# Altium PCB tekprobe.PcbDoc (part 1 of 2)
Units mm, origin at the board's own origin, x right, y up, seen from the top; angles counter-clockwise.
Board outline 60 x 55 mm, 2 copper layers (Top Layer, Bottom Layer), stack 1.572 mm thick; 47 components, 34 nets, 159 pads, 92 vias.
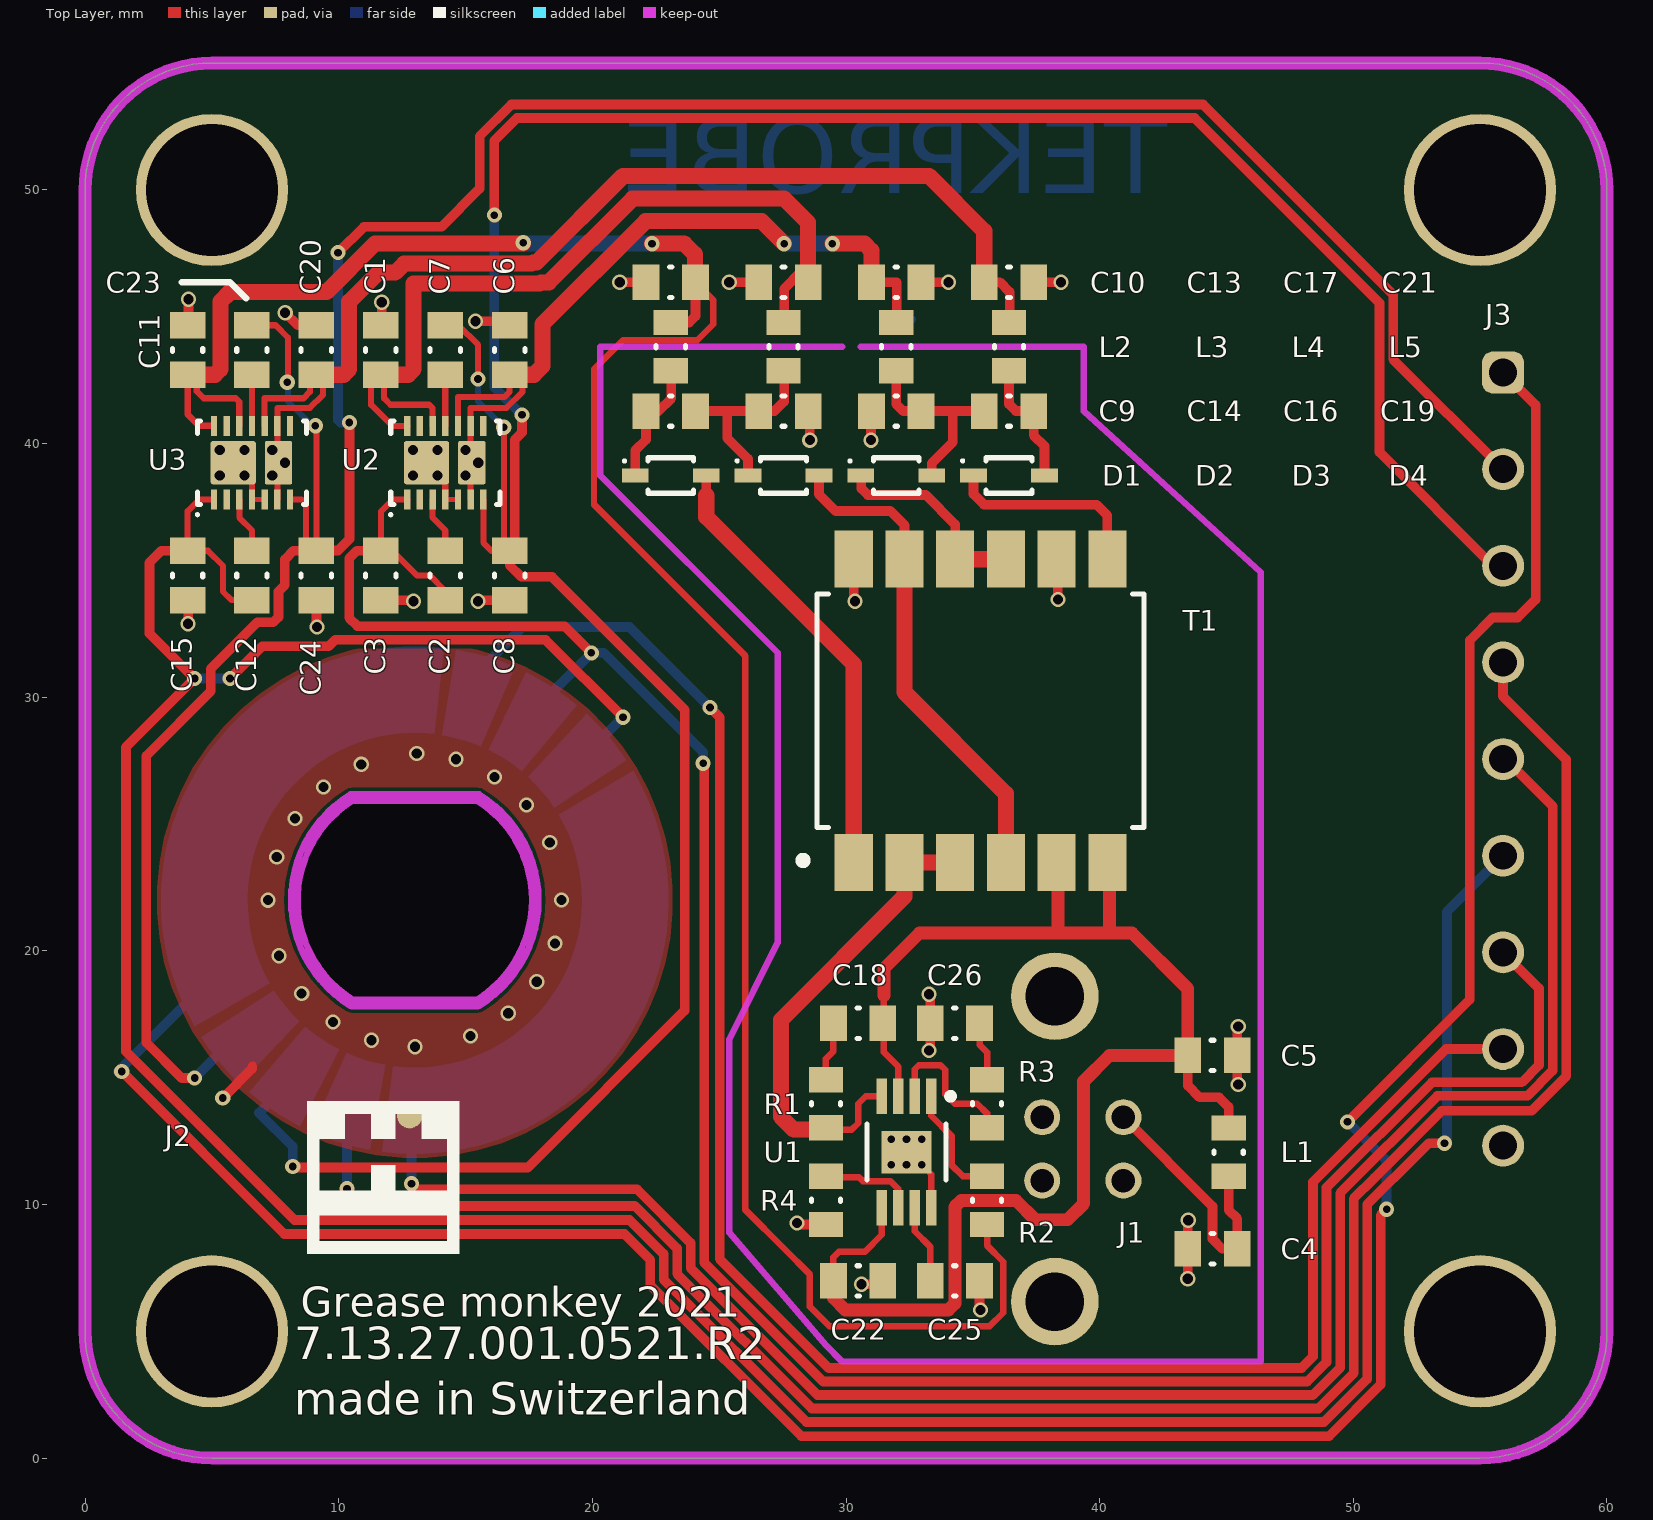
[diagram p0: Top Layer view]
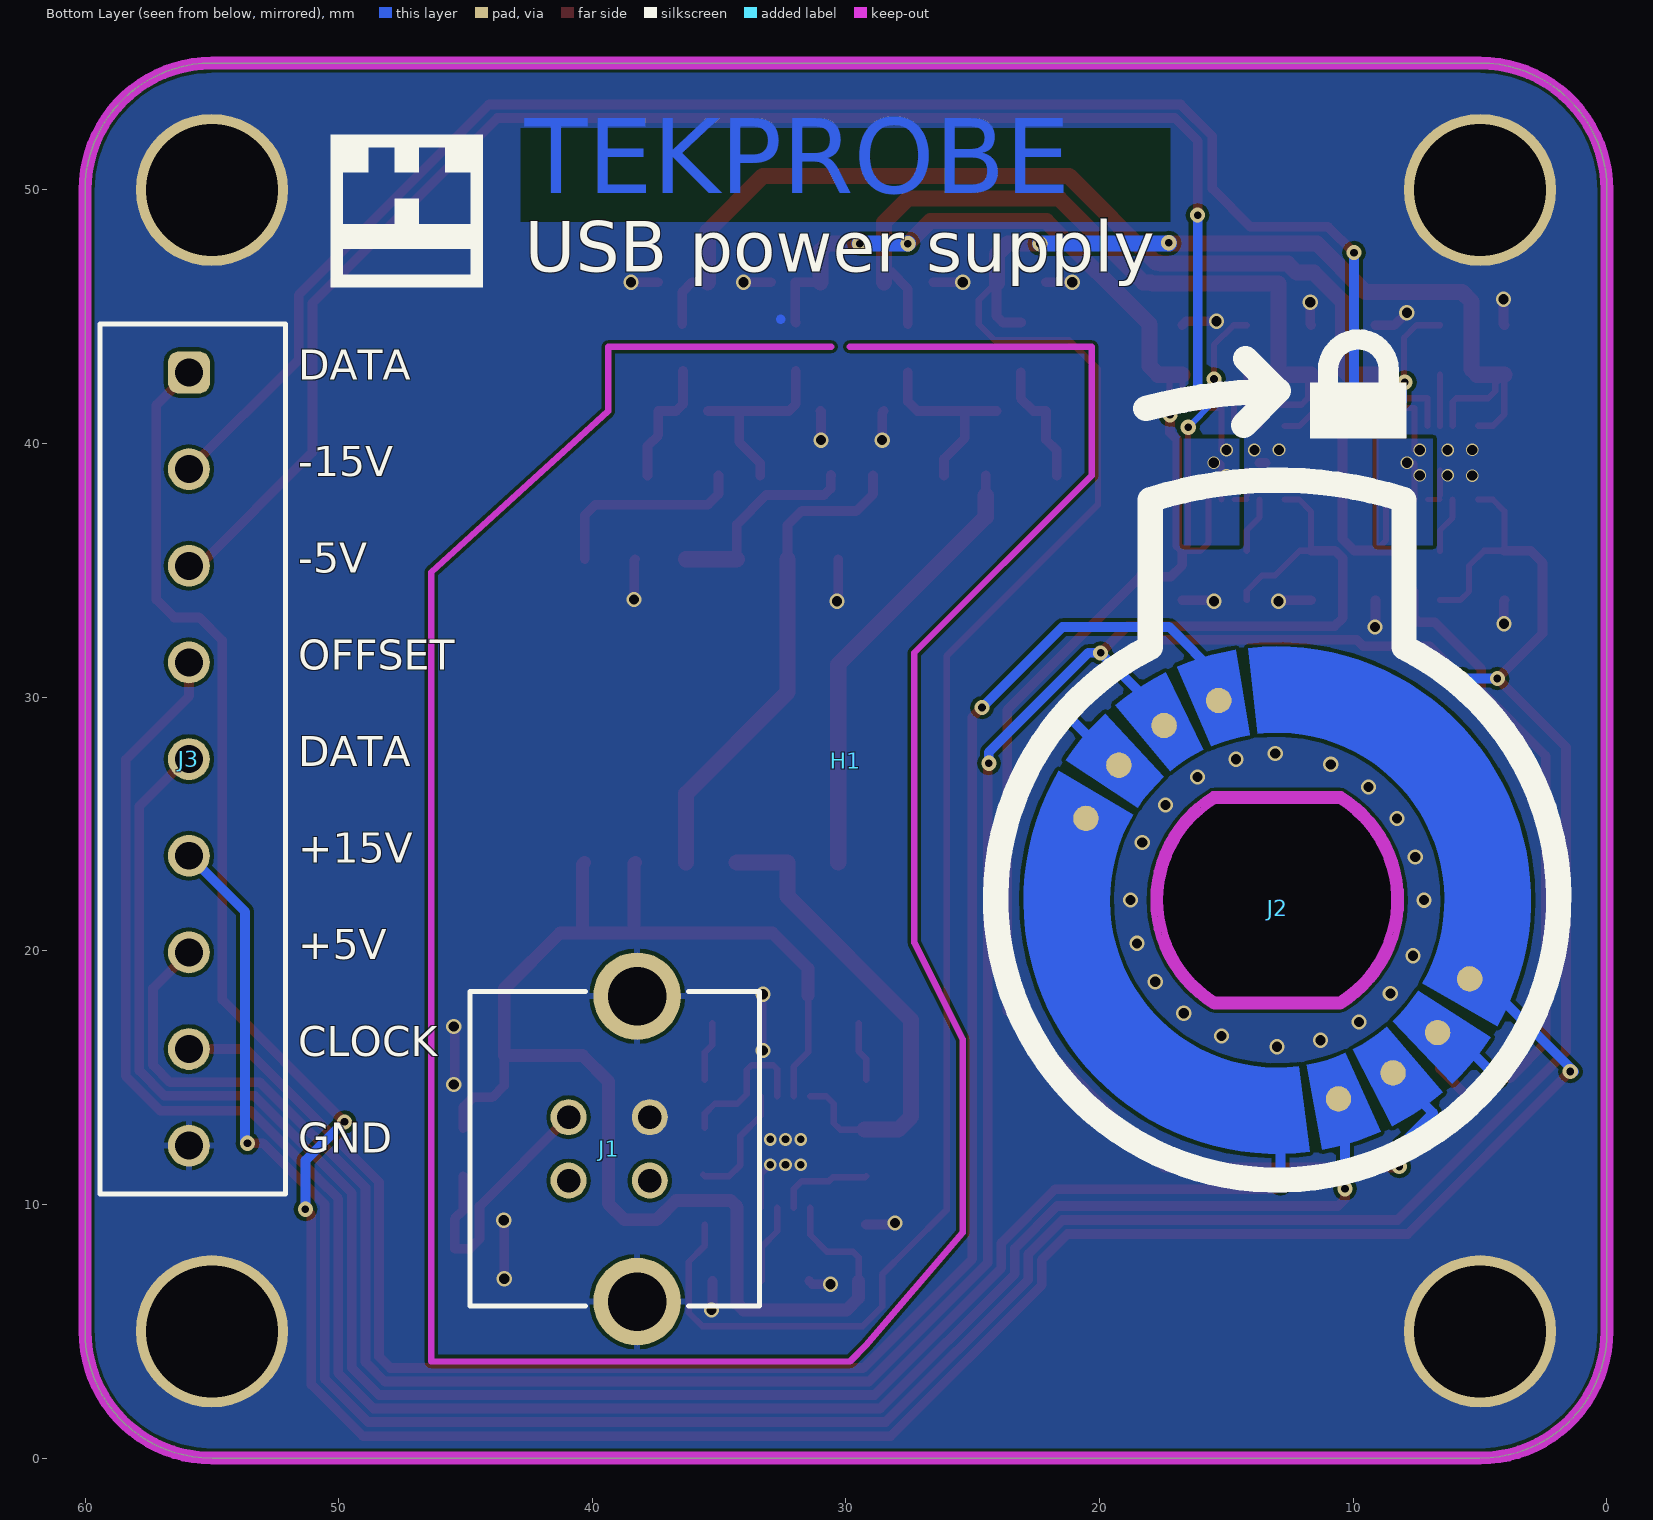
[diagram p1: Bottom Layer view, seen from below]

## Layer stack, top to bottom
Top Solder: solder mask 0.01, Solder Resist, Dk 3.5
Top Layer: signal copper 0.036
Dielectric 1: dielectric 1.5, FR-4, Dk 4.8
Bottom Layer: signal copper 0.036
Bottom Solder: solder mask 0.01, Solder Resist, Dk 3.5

## Board outline
0,4.999 ccw(c4.999,4.999) 4.999,0 55.001,0 ccw(c55.001,4.999) 60,5.003 60,4.999 60,50.001 ccw(c55.001,50.001) 55.001,55 4.999,55 ccw(c4.999,50.001) 0,50.001

## Design rules (kind name [scope] priority, off if disabled: settings)
Clearance Clearance_1 [inPolygon vs (OnLayer('Keep-Out Layer'))] p1: gap=0.127 ignorepadtopadclearanceinfootprint=FALSE except(0: Arc-Hole Track-Hole SMDPad-Hole THPad-Hole Via-Hole Fill-Hole Poly-Hole Region-Hole Text-Hole)
Clearance [All] p2: gap=0.152 ignorepadtopadclearanceinfootprint=FALSE except(0: Arc-Hole Track-Hole SMDPad-Hole THPad-Hole Via-Hole Fill-Hole Poly-Hole Region-Hole Text-Hole)
ComponentClearance [(Name <> 'A1') And (Name <> 'Q1') vs (Name <> 'A1') And (Name <> 'Q1')] p1: gap=0.127 collisioncheckmode=3 verticalgap=0.254 showdistances=FALSE
DiffPairsRouting [All] p1: maxlimit=0.254 minlimit=0.152 mostfreqgap=0.254 toplayer_minwidth=0.152 toplayer_maxwidth=0.381 toplayer_prefwidth=0.381 bottomlayer_minwidth=0.152 bottomlayer_maxwidth=0.381 bottomlayer_prefwidth=0.381 maxuncoupledlength=12.7
Height [All] p1: minheight=0 maxheight=127 prefheight=12.7
HoleSize [All] p1: absolutevalues=TRUE maxlimit=25.4 minlimit=0.3 maxpercent=80.000 minpercent=20.000
MinimumSolderMaskSliver [All] p1: minsoldermaskwidth=0.114
PlaneClearance [All] p1: clearance=0.762
PolygonConnect PolygonConnect_via [IsVia] p1: connectstyle=Direct reliefconductorwidth=0.254 reliefentries=4 polygonreliefangle="90 Angle" airgapwidth=0.254
PolygonConnect [All] p2: connectstyle=Direct reliefconductorwidth=0.254 reliefentries=4 polygonreliefangle="90 Angle" airgapwidth=0.152
RoutingVias [All] p1: holewidth=0.3 width=0.6 viastyle="Through Hole" minholewidth=0.3 minwidth=0.5 maxholewidth=5 maxwidth=10
ShortCircuit ShortCircuit_no_net [Not InAnyNet vs Not InAnyNet] p1: allowed=TRUE
ShortCircuit [not InNet('No Net') vs not InNet('No Net')] p2: allowed=FALSE
SilkToSilkClearance [All] p1 off: silktosilkclearance=0.127
SilkToSolderMaskClearance [IsPad] p1: minsilkscreentomaskgap=0.127 clearancetoexposedcopper=TRUE
SolderMaskExpansion [All] p1: expansion=0.102 istentingtop=FALSE
Width [All] p1: maxlimit=25.4 minlimit=0.152 preferedwidth=0.254 minimp=50.000000 maximp=50.000000 favimp=50.000000
21 further rules are at their usual default settings.

## Classes and differential pairs
component class "tekprobe P2": C1 C2 C3 C6 C7 C8 C10 C11 C12 C13 C15 C17 C20 C21 C23 C24 J2 J3 U2 U3
component class tekprobe: C4 C5 C9 C14 C16 C18 C19 C22 C25 C26 D1 D2 D3 D4 H1 J1 L1 L2 L3 L4 L5 R1 R2 R3 R4 T1 U1

## Components (designator, comment, footprint, x,y, rotation, side; value= is the part's Value field where it differs from the comment)
C1 "10uF" CAP_0805 11.662,43.688 r90 top
C2 "3300pF" CAP_0805 14.202,34.798 r270 top
C3 "10uF" CAP_0805 11.662,34.798 r270 top
C4 "1uF" CAP_0805 44.45,8.255 r180 top
C5 "10uF" CAP_0805 44.45,15.875 r0 top
C6 "10uF" CAP_0805 16.742,43.688 r90 top
C7 "3300pF" CAP_0805 14.202,43.688 r270 top
C8 "10uF" CAP_0805 16.742,34.798 r270 top
C9 "10uF" CAP_0805 23.089,41.28 r0 top
C10 "0.1uF" CAP_0805 23.089,46.36 r180 top
C11 "10uF" CAP_0805 4.042,43.688 r90 top
C12 "3300pF" CAP_0805 6.582,34.798 r270 top
C13 "0.1uF" CAP_0805 27.534,46.36 r180 top
C14 "10uF" CAP_0805 27.534,41.28 r0 top
C15 "10uF" CAP_0805 4.042,34.798 r270 top
C16 "10uF" CAP_0805 31.979,41.28 r0 top
C17 "0.1uF" CAP_0805 31.979,46.36 r0 top
C18 "470pF" CAP_0805 30.48,17.145 r180 top
C19 "10uF" CAP_0805 36.424,41.28 r0 top
C20 "10uF" CAP_0805 9.122,43.688 r90 top
C21 "0.1uF" CAP_0805 36.424,46.36 r0 top
C22 "10uF" CAP_0805 30.48,6.985 r0 top
C23 "3300pF" CAP_0805 6.582,43.688 r270 top
C24 "10uF" CAP_0805 9.122,34.798 r270 top
C25 "0.1uF" CAP_0805 34.29,6.985 r0 top
C26 "1nF" CAP_0805 34.29,17.145 r180 top
D1 "1N4148WSTR" SODFL250X100-2N 23.089,38.74 r0 top
D2 "1N4148WSTR" SODFL250X100-2N 27.534,38.74 r0 top
D3 "1N4148WSTR" SODFL250X100-2N 31.979,38.74 r0 top
D4 "1N4148WSTR" SODFL250X100-2N 36.424,38.74 r0 top
H1 "Aluminum Enclosure" 1550Q 60,0 r180 bottom locked
J1 "USB 2.0 Type B Receptacle" 61400413321 39.116,12.192 r90 bottom
J2 "TEKPROBE interface" tekprobe 13,22 r180 bottom
J3 "691243310009" 691243310009 55.753,27.559 r270 bottom
L1 "MFBW1V2012-801-R" RES_0805 45.085,12.065 r90 top
L2 "MFBW1V2012-801-R" RES_0805 23.089,43.82 r90 top
L3 "MFBW1V2012-801-R" RES_0805 27.534,43.82 r90 top
L4 "MFBW1V2012-801-R" RES_0805 31.979,43.82 r90 top
L5 "MFBW1V2012-801-R" RES_0805 36.424,43.82 r90 top
R1 "22" RES_0805 29.21,13.97 r270 top
R2 "180k" RES_0805 35.56,10.16 r90 top
R3 "10k" RES_0805 35.56,13.97 r90 top
R4 "90k9" RES_0805 29.21,10.16 r270 top
T1 "749196141" WE-FLEX_ER11/5 35.306,29.464 r0 top
U1 "LT3580EMS8E" LT3580 32.385,12.065 r270 top
U2 "LT3032EDE-5#PBF" LT3032 14.202,39.243 r90 top
U3 "LT3032IDE-15#PBF" LT3032 6.582,39.243 r90 top

## Footprints (in the part's own frame and the unit in brackets; to place one, negate y for a bottom-side part, rotate by r counter-clockwise, add the part's x,y. Pads: shape width x height; smd on the part's side, far side on the other; paste and mask are expansions set on the pad)
1550Q [mm]
  round 6 hole 5.2: 1(5,50) 2(55,50) 3(55,5) 4(5,5)
  body extent 0,0 60,55, height 0.6
61400413321 [mm] "USB 2.0 Type B Vertical"
  round 1.42 hole 0.92: 1(1.25,1.82) 2(-1.25,1.82) 3(-1.25,-1.38) 4(1.25,-1.38)
  round 3.45 hole 2.3: Shell(-6.02,-0.88) Shell(6.02,-0.88)
  silkscreen extent -6.2,-5.7 6.2,5.7, body extent -7.35,-5.6 7.35,5.6, height 16.2
691243310009 [mm] "Serie 2433 - 3.81 mm _ 9 pins"
  rrect50% 1.65x1.65 hole 1.1: 1(-15.24,-0.15)
  round 1.65 hole 1.1: 2(-11.43,-0.15) 3(-7.62,-0.15) 4(-3.81,-0.15) 5(0,-0.15) 6(3.81,-0.15) 7(7.62,-0.15) 8(11.43,-0.15) 9(15.24,-0.15)
  silkscreen extent -17.14,-3.65 17.14,3.65, body extent -17.14,-3.65 17.15,3.65, height 9.15
CAP_0805 [mm]
  rect 1.05x1.4 smd: 1(-0.975,0) 2(0.975,0)
  silkscreen extent -0.05,-0.6 0.05,0.6, body extent -1.1,-0.67 1.1,0.67, height 1.35
LT3032 [mm] "SON, 14-Leads, Body 4.00x3.00mm, Pitch 0.50mm, Thermal Pad 2.34x1.62mm, IPC Medium Density"
  rect 0.8x0.25 smd mask+0.03: 1(-1.45,1.5) 2(-1.45,1) 3(-1.45,0.5) 4(-1.45,0) 5(-1.45,-0.5) 6(-1.45,-1) 7(-1.45,-1.5) 8(1.45,-1.5) 9(1.45,-1) 10(1.45,-0.5) 11(1.45,0) 12(1.45,0.5) 13(1.45,1) 14(1.45,1.5)
  rrect10% 1.7x1.78 smd mask+0.03: 15(0,0.74)
  rrect10% 1.7x1.07 smd mask+0.03: 16(0,-1.045)
  Top Layer lines w0.24: -1.3,0 -0.3,0 ; 0.5,-1 1.5,-1
  silkscreen extent -2.1,-2.15 1.65,2.2, body extent -1.55,-2 1.55,2, height 0.75
LT3580 [mm] "TSOP, 8-Leads, Body 3.00x3.00mm, Pitch 0.65mm, Thermal Pad 1.88x1.68mm, IPC Medium Density"
  rect 1.4x0.42 smd mask+0.05: 1(-2.2,0.975) 2(-2.2,0.325) 3(-2.2,-0.325) 4(-2.2,-0.975) 5(2.2,-0.975) 6(2.2,-0.325) 7(2.2,0.325) 8(2.2,0.975)
  rect 1.68x1.98 smd mask+0.05: 9(0,0)
  silkscreen extent -2.32,-1.55 1.1,1.86, body extent -2.45,-1.55 2.45,1.55, height 1.1
RES_0805 [mm] "Chip Resistor, 2-Leads, Body 2.10x1.30mm, IPC Medium Density"
  rect 1x1.35 smd: 1(-0.95,0) 2(0.95,0)
  silkscreen extent -0.05,-0.58 0.05,0.58, body extent -1.1,-0.67 1.1,0.67, height 0.65
SODFL250X100-2N [mm] "SODFL, 2-Leads, Body 1.25x2.50mm, IPC Medium Density"
  rect 1.05x0.55 smd: A(1.4,0) K(-1.4,0)
  silkscreen extent -1.87,-0.7 0.9,0.7, body extent -1.25,-0.67 1.25,0.67, height 1
tekprobe [mm]
  round 1 smd: 1(7.589,-3.107) 2(6.323,-5.221) 3(4.567,-6.81) 4(2.416,-7.836) 5(-7.54,3.222) 6(-6.242,5.318) 7(-4.457,6.883) 8(-2.306,7.869)
  round 1 smd far side mask+0.102: 9(0.2,-8.5)
  Top Layer region: 6.902,-7.237 4.555,-4.776 5.089,-4.202 5.552,-3.569 5.552,-3.569 5.552,-3.569 8.412,-5.408 7.711,-6.367 6.902,-7.237
  Top Layer region: 8.671,-4.981 9.968,-0.798 9.354,3.537 6.946,7.194 3.206,9.472 -1.148,9.934 -1.148,9.934 -0.758,6.556 -0.758,6.556 2.116,6.252 4.584,4.748 6.173,2.335 6.579,-0.527 5.723,-3.287 5.723,-3.287
  Top Layer region: 4.527,-8.917 2.988,-5.885 3.676,-5.482 4.311,-4.998 4.311,-4.998 6.531,-7.573 6.531,-7.573 5.57,-8.305 4.527,-8.917
  Top Layer region: 1.774,-9.841 1.171,-6.495 1.171,-6.495 1.945,-6.307 2.69,-6.027 2.69,-6.027 4.075,-9.132 2.946,-9.556 1.774,-9.841
  Top Layer region: 1.28,-9.918 -3.131,-9.497 -6.927,-7.212 -9.363,-3.511 -9.961,0.879 -8.604,5.097 -8.604,5.097 -5.679,3.364 -6.574,0.58 -6.18,-2.318 -4.572,-4.76 -2.066,-6.268 0.845,-6.546 0.845,-6.546
  Top Layer region: -8.338,5.52 -5.503,3.643 -5.024,4.28 -4.471,4.855 -4.471,4.855 -6.774,7.356 -7.612,6.486 -8.338,5.52
  Top Layer region: -4.222,5.082 -6.388,7.685 -5.432,8.388 -4.399,8.973 -4.399,8.973 -2.91,5.931 -3.591,5.546 -4.222,5.082
  Top Layer region: -2.608,6.063 -3.947,9.188 -3.948,9.188 -3.948,9.188 -3.948,9.188 -3.948,9.191 -3.947,9.195 -3.944,9.197 -3.944,9.197 -3.944,9.197 -2.815,9.603 -1.645,9.871 -1.645,9.871 -1.641,9.87 -1.638,9.868 -1.637,9.865 -1.637,9.865 -1.078,6.511 -1.078,6.511 -1.078,6.51 -1.078,6.51 -1.079,6.507 -1.081,6.505 -1.084,6.504 -1.084,6.504 -1.084,6.504 -1.854,6.327 -2.599,6.06 -2.599,6.06 -2.599,6.06 -2.601,6.059 -2.604,6.06 -2.606,6.061 -2.607,6.063
  Keep-Out Layer board cut-out: -2.482,-4.05 2.482,-4.05 4.144,-2.321 4.75,0 4.144,2.321 2.482,4.05 2.482,4.05 -2.482,4.05 -4.144,2.321 -4.75,0 -4.144,-2.321 -2.482,-4.05
  silkscreen extent -11.1,-11.04 11.1,22.1, body extent -6.5,-6.5 6.5,6.5, height 12.6
WE-FLEX_ER11/5 [mm] "Flexible Transformer for DC/DC Converter, size ER11/5"
  rect 1.5x2.25 smd: 1(-5,-5.975) 2(-3,-5.975) 3(-1,-5.975) 4(1,-5.975) 5(3,-5.975) 6(5,-5.975) 7(5,5.975) 8(3,5.975) 9(1,5.975) 10(-1,5.975) 11(-3,5.975) 12(-5,5.975)
  silkscreen extent -7.15,-6.05 6.45,4.6, body extent -6.45,-6.5 6.45,6.5, height 6.2

## Part data
C1 C3 C5 C6 C8 C9 C11 C14 C15 C16 C19 C20 C22 C24: library part CL21A106KAYNNNG, "CAP CER 10UF 25V X5R 0805", Case Code (Imperial)=0805, Case Code (Metric)=2012, Dielectric=X5R, Manufacturer=Samsung, Max Operating Temperature=85°C, Min Operating Temperature=-55°C, Package Quantity=3000, Supplier Part Number 1=1276-6454-1-ND, Tolerance=10%, Voltage Rating=25V, Capacitance=10uF, Case/Package=0805, Category="Ceramic Capacitors", ComponentLink1Description=https://datasheet.ciiva.com/26920/getdatasheetpartid-660292-26920195.pdf?src-supplier=Verical, ComponentLink1URL=https://datasheet.ciiva.com/26920/getdatasheetpartid-660292-26920195.pdf?src-supplier=Verical, Construction=Flat, Depth=1.25mm, Height=1.25mm, Lead Free="Lead Free", Length=2mm, Manufacturer Part Number=CL21A106KAYNNNG, Mount="Surface Mount", Packaging="Tape and Reel", Pricing 1="1=0.21000, 10=0.14600, 50=0.08280, 100=0.06870, 500=0.04816, 1000=0.03987 (USD)", Radiation Hardening=No, RoHS=Yes, RoHS Compliant=Yes, Series=CL, Stock 1=221798, Supplier 1=Digi-Key, Thickness=0.057inch, Width=0.049inch
C2 C7 C12 C23: library part C0805C332K5RACTU, "KEMET - C0805C332K5RACTU - SMD Multilayer Ceramic Capacitor, 3300 pF, 50 V, 0805 [2012 Metric], ± 10%, X7R, C Series KEMET", Capacitance=3.3nF, Case Code (Imperial)=0805, Case Code (Metric)=2012, Dielectric=X7R, Dielectric Material=Ceramic, Manufacturer=KEMET, Max Operating Temperature=125°C, Min Operating Temperature=-55°C, Package Quantity=1, Supplier Part Number 1=399-1153-1-ND, Tolerance=10%, Voltage=50V, Case/Package=0805, Category="Ceramic Capacitors", ComponentLink1Description=https://datasheet.ciiva.com/7842/kem-c1002-x7r-smd-7842598.pdf?src-supplier=Element14, ComponentLink1URL=https://datasheet.ciiva.com/7842/kem-c1002-x7r-smd-7842598.pdf?src-supplier=Element14, ComponentLink2Description=https://datasheet.ciiva.com/26948/getdatasheetpartid-385720-26948486.pdf?src-supplier=Verical, ComponentLink2URL=https://datasheet.ciiva.com/26948/getdatasheetpartid-385720-26948486.pdf?src-supplier=Verical, ComponentLink3Description=https://datasheet.ciiva.com/5415/kem-c1002-x7r-smd-357932-5415032.pdf?src-supplier=Mouser, ComponentLink3URL=https://datasheet.ciiva.com/5415/kem-c1002-x7r-smd-357932-5415032.pdf?src-supplier=Mouser, ComponentLink4Description=https://datasheet.ciiva.com/6126/kem-c1002-x7r-smd-6126698.pdf?src-supplier=Farnell, ComponentLink4URL=https://datasheet.ciiva.com/6126/kem-c1002-x7r-smd-6126698.pdf?src-supplier=Farnell, ComponentLink5Description=https://datasheet.ciiva.com/7842/1851736-7842314.pdf?src-supplier=Element14, ComponentLink5URL=https://datasheet.ciiva.com/7842/1851736-7842314.pdf?src-supplier=Element14, ComponentLink6Description=https://datasheet.ciiva.com/7842/1851736-7842315.pdf?src-supplier=Element14, ComponentLink6URL=https://datasheet.ciiva.com/7842/1851736-7842315.pdf?src-supplier=Element14, Construction=Flat, Contact Plating=Tin,Matte, Depth=1.25mm, Dissipation Factor=2.5%, Height=0.78mm, Lead Pitch=0.75mm, Length=2mm, Manufacturer Part Number=C0805C332K5RACTU, Mount="Surface Mount", Number of Pins=2, Packaging="Tape and Reel", Pricing 1="1=0.10000, 10=0.06700, 50=0.03660, 100=0.02990, 500=0.02134, 1000=0.01676 (USD)", Radiation Hardening=No, REACH SVHC="No SVHC", RoHS=Yes, RoHS Compliant=Yes, Series=C, Stock 1=33474, Supplier 1=Digi-Key, Termination=SMD/SMT, Thickness=0.035inch, Voltage Rating=50V, Voltage Rating (DC)=50V, Width=0.049inch
C4: library part CL21B105KAFNFNE, "CAP CER 1UF 25V X7R 0805", Case Code (Imperial)=0805, Case Code (Metric)=2012, Dielectric=X7R, Manufacturer=Samsung, Max Operating Temperature=125°C, Min Operating Temperature=-55°C, Package Quantity=1, Supplier Part Number 1=1276-2926-1-ND, Tolerance=10%, Voltage Rating=25V, Capacitance=1uF, Case/Package=0805, Category="Ceramic Capacitors", ComponentLink1Description=https://datasheet.ciiva.com/25713/cl21b105kafnfne-25713092.pdf?src-supplier=Digi-Key, ComponentLink1URL=https://datasheet.ciiva.com/25713/cl21b105kafnfne-25713092.pdf?src-supplier=Digi-Key, Construction=Flat, Depth=1.25mm, Height=1.25mm, Length=0.079inch, Manufacturer Part Number=CL21B105KAFNFNE, Mount="Surface Mount", Packaging="Tape and Reel", Pricing 1="1=0.10000, 10=0.07300, 50=0.03980, 100=0.03260, 500=0.02326, 1000=0.01828 (USD)", Radiation Hardening=No, RoHS=Yes, RoHS Compliant=Yes, Series=CL, Stock 1=271579, Supplier 1=Digi-Key, Thickness=0.053inch, Width=0.049inch
C10 C13 C17 C21 C25: library part CL21B104MACNNNC, "CAP CER 0.1UF 25V X7R 0805", Capacitance=100nF, Case Code (Imperial)=0805, Case Code (Metric)=2012, Dielectric=X7R, Manufacturer=Samsung, Max Operating Temperature=125°C, Min Operating Temperature=-55°C, Package Quantity=1, Supplier Part Number 1=1276-2449-1-ND, Tolerance=20%, Voltage Rating=25V, Case/Package=0805, Category="Ceramic Capacitors", ComponentLink1Description=https://datasheet.ciiva.com/26936/getdatasheetpartid-782453-26936905.pdf?src-supplier=Verical, ComponentLink1URL=https://datasheet.ciiva.com/26936/getdatasheetpartid-782453-26936905.pdf?src-supplier=Verical, Construction=Flat, Depth=1.25mm, Height=0.85mm, Lead Free="Lead Free", Length=2mm, Manufacturer Part Number=CL21B104MACNNNC, Mount="Surface Mount", Packaging="Tape and Reel", Pricing 1="1=0.10000, 10=0.03200, 50=0.01720, 100=0.01410, 500=0.01006, 1000=0.00791 (USD)", Radiation Hardening=No, RoHS=Yes, RoHS Compliant=Yes, Series=CL, Stock 1=134913, Supplier 1=Digi-Key, Thickness=0.037inch, Voltage Rating (DC)=25V, Width=0.049inch
C18: library part 885012207084, "CAP CER 470PF 50V X7R 0805", Case Code (Imperial)=0805, Case Code (Metric)=2012, Manufacturer="Wurth Electronics", Max Operating Temperature=125°C, Min Operating Temperature=-55°C, Supplier Part Number 1=732-8066-1-ND, Tolerance=10%, Voltage Rating=50V, Capacitance=470pF, Case/Package=0805, Category="Ceramic Capacitors", ComponentLink1Description=https://katalog.we-online.de/pbs/datasheet/885012207084.pdf?src-supplier=Digi-Key, ComponentLink1URL=https://katalog.we-online.de/pbs/datasheet/885012207084.pdf?src-supplier=Digi-Key, Length=0.079inch, Manufacturer Part Number=885012207084, Mount="Surface Mount", Packaging="Tape and Reel", Pricing 1="1=0.10000, 10=0.04000, 100=0.03590, 500=0.03172 (USD)", RoHS=Yes, RoHS Compliant=Yes, Stock 1=227, Supplier 1=Digi-Key, Thickness=0.035inch, Width=0.049inch
C26: library part CL21B102KBANNNC, "Cap Ceramic 0.001uF 50VDC X7R 10% SMD 0805 Paper T/R", Case Code (Imperial)=0805, Case Code (Metric)=2012, Dielectric=X7R, Manufacturer=Samsung, Max Operating Temperature=125°C, Min Operating Temperature=-55°C, Package Quantity=4000, Supplier Part Number 1=1276-1020-1-ND, Tolerance=10%, Voltage=50V, Capacitance=1nF, Case/Package=0805, Category="Ceramic Capacitors", ComponentLink1Description=https://datasheet.ciiva.com/25802/cl21b102kbannnc-25802496.pdf?src-supplier=Digi-Key, ComponentLink1URL=https://datasheet.ciiva.com/25802/cl21b102kbannnc-25802496.pdf?src-supplier=Digi-Key, ComponentLink2Description=https://datasheet.ciiva.com/26838/getdatasheetpartid-357425-26838638.pdf?src-supplier=Verical, ComponentLink2URL=https://datasheet.ciiva.com/26838/getdatasheetpartid-357425-26838638.pdf?src-supplier=Verical, ComponentLink3Description=https://datasheet.ciiva.com/29199/456076-da-01-en-vs-kondensator-0805-29199069.pdf?src-supplier=Conrad, ComponentLink3URL=https://datasheet.ciiva.com/29199/456076-da-01-en-vs-kondensator-0805-29199069.pdf?src-supplier=Conrad, Construction=Flat, Contact Plating=Tin, Depth=1.25mm, Height=0.65mm, Length=2mm, Manufacturer Part Number=CL21B102KBANNNC, Material=Ceramic, Mount="Surface Mount", Packaging="Tape and Reel", Pricing 1="1=0.10000, 10=0.04300, 50=0.02340, 100=0.01920, 500=0.01368, 1000=0.01075 (USD)", Radiation Hardening=No, RoHS=Yes, RoHS Compliant=Yes, Series=CL, Stock 1=281332, Supplier 1=Digi-Key, Thickness=0.03inch, Voltage Rating=50V, Width=0.049inch
D1 D2 D3 D4: "DIODE GEN PURP 75V 300MA SOD323", Average Rectified Current=300mA, Manufacturer=SMC, Max Reverse Voltage (DC)=75V, Supplier Part Number 1=1655-1359-1-ND, Category="Rectifier Diodes", ComponentLink1Description=http://www.smc-diodes.com/propdf/1N4148WS%20N0572%20REV.B.pdf?src-supplier=Digi-Key, ComponentLink1URL=http://www.smc-diodes.com/propdf/1N4148WS%20N0572%20REV.B.pdf?src-supplier=Digi-Key, Manufacturer Part Number=1N4148WSTR, Mount="Surface Mount", Packaging="Tape and Reel", Pricing 1="1=0.13000, 10=0.12100, 100=0.06610, 500=0.04066, 1000=0.02772 (USD)", Reverse Recovery Time=4ns, RoHS=No, Stock 1=173635, Supplier 1=Digi-Key
H1: library part 1550Q, "BOX ALUM UNPAINTED 2.36\"LX2.17\"W", Case/Package=Metal, Color=Natural, Manufacturer="Hammond Manufacturing", Package Quantity=1, Ratings=IP54, Supplier Part Number 1=HM1204-ND, Body Material=Aluminium, Category=Enclosures, ComponentLink1Description=https://datasheet.ciiva.com/20198/30-3787-20198174.pdf?src-supplier=Rapid+Electronics, ComponentLink1URL=https://datasheet.ciiva.com/20198/30-3787-20198174.pdf?src-supplier=Rapid+Electronics, ComponentLink2Description=https://datasheet.ciiva.com/29344/534473-da-01-en-aluminiumgeh-1550q-60x55x30mm-29344749.pdf?src-supplier=Conrad, ComponentLink2URL=https://datasheet.ciiva.com/29344/534473-da-01-en-aluminiumgeh-1550q-60x55x30mm-29344749.pdf?src-supplier=Conrad, ComponentLink3Description=https://datasheet.ciiva.com/16928/70165840-16928747.pdf?src-supplier=Allied+Electronics, ComponentLink3URL=https://datasheet.ciiva.com/16928/70165840-16928747.pdf?src-supplier=Allied+Electronics, Depth=26mm, Height=1.185inch, Housing Material=Aluminium, Length=2.362inch, Manufacturer Part Number=1550Q, Material=Aluminium,Metal, Pricing 1="1=6.46000, 5=5.97600, 10=5.49100, 25=5.16800, 50=4.84500, 100=4.52200, 250=4.44124, 500=4.36050, 1000=4.29590 (USD)", REACH SVHC="No SVHC", RoHS=Yes, Stock 1=666, Supplier 1=Digi-Key, Thickness=0.059inch, Weight=6.702053oz, Width=2.17inch
J1: library part 61400413321, "USB 2.0 Type B, Receptacle, Vertical, THT", Manufacturer="Wurth Elektronik", Operating Temperature="-40 to +105degC", Rated Current=1.5A, Working Voltage=30VAC, Application="USB 2.0", ComponentLink1Description=Manufacturer, ComponentLink1URL=http://www.we-online.de, ComponentLink2Description=Datasheet, ComponentLink2URL=https://katalog.we-online.com/em/datasheet/61400413321.pdf, Gender=Receptacle, Interface Type="Type B", Manufacturer Part Number=61400413321, Mounting Technology=THT, Packaging=Tray, Pin Number=4, Published Date="August 2020", Type=Vertical
J2: library part TEKPROBE, "CONN BNC JACK STR 50 OHM SOLDER", Dielectric Material=Polymethylpentene, Frequency=4GHz, Insulation Resistance=5GR, Manufacturer="TE Connectivity", Manufacturer Part Number=5-1634523-1, Max Operating Temperature=85°C, Min Operating Temperature=-55°C, Package Quantity=100, Supplier Part Number 1=A97548-ND, Body Material=Zinc, Body Plating=Nickel, Category="RF / Coaxial Connectors", ComponentLink1Description=https://datasheet.ciiva.com/23783/1664198-23783552.pdf?src-supplier=Newark, ComponentLink1URL=https://datasheet.ciiva.com/23783/1664198-23783552.pdf?src-supplier=Newark, ComponentLink2Description=https://datasheet.ciiva.com/11762/0900766b80c71412-11762344.pdf?src-supplier=RSComponents, ComponentLink2URL=https://datasheet.ciiva.com/11762/0900766b80c71412-11762344.pdf?src-supplier=RSComponents, ComponentLink3Description=https://datasheet.ciiva.com/642/eng-cd-1634523-c-642763.pdf?src-supplier=Digi-Key, ComponentLink3URL=https://datasheet.ciiva.com/642/eng-cd-1634523-c-642763.pdf?src-supplier=Digi-Key, ComponentLink4Description=https://datasheet.ciiva.com/16652/eng-ds-6-1773448-5-zdc-rf-coax-50-75-ohm-1007-16652902.pdf?src-supplier=Avnet+Europe, ComponentLink4URL=https://datasheet.ciiva.com/16652/eng-ds-6-1773448-5-zdc-rf-coax-50-75-ohm-1007-16652902.pdf?src-supplier=Avnet+Europe, ComponentLink5Description=https://datasheet.ciiva.com/3131/eng-ds-6-1773448-5-zdc-rf-coax-50-75-ohm-1007-3131991.pdf?src-supplier=Avnet, ComponentLink5URL=https://datasheet.ciiva.com/3131/eng-ds-6-1773448-5-zdc-rf-coax-50-75-ohm-1007-3131991.pdf?src-supplier=Avnet, ComponentLink6Description=https://datasheet.ciiva.com/1448/580087-1448590.pdf?src-supplier=Element14, ComponentLink6URL=https://datasheet.ciiva.com/1448/580087-1448590.pdf?src-supplier=Element14, Connector Type=BNC,Jack, Contact Material=Bronze, Contact Plating=Gold, Depth=13mm, ELV=Compliant, Fastening Type=Bayonet, Gender=Female, Impedance=50R, Insulation Material=Polymethylpentene, Length=27.3mm, Max Frequency=4GHz, Mount=Panel, Number of Positions=1, Orientation=Straight, Packaging=Bulk, PCB Mount Retention=Without, Plating=Nickel, Polarity=Normal, Pricing 1="1=1.95000, 10=1.77400, 25=1.66520, 50=1.59260, 100=1.52030, 250=1.37552, 500=1.26692, 1000=1.08593 (USD)", Radiation Hardening=No, REACH SVHC=Unknown, RoHS=Yes, Sealable="No (Without)", Stock 1=14744, Supplier 1=Digi-Key, Termination=Solder
J3: "WR-TBL Serie 2433 Horizontal Entry Modular, Rising Cage Clamp, THT, pitch 3.81mm, 9p", Manufacturer="Wurth Elektronik", Operating Temperature="-30 to +120degC", Rated Current [UL]=10A, Working Voltage [UL]=300VAC, Application="Rising Cage Clamp", ComponentLink1Description=Manufacturer, ComponentLink1URL=http://www.we-online.de, ComponentLink2Description=Datasheet, ComponentLink2URL=https://katalog.we-online.de/em/datasheet/691243310009.pdf, Manufacturer Part Number=691243310009, Modularity=No, Mounting Technology=THT, Packaging=Box, PCB/Cable/Panel=PCB, Pin Number=9, Pitch=3.81mm, Published Date="Feburary 2021", Type=Horizontal
L1 L2 L3 L4 L5: "Ferrite Chip Bead 800Ohm 800mA 0.3Ohm Multi-Layer 2-Pin 0805 T/R", Manufacturer="Cooper Bussmann", Supplier Part Number 1=283-MFBW1V2012-801-RCT-ND, ComponentLink1Description=http://datasheet.octopart.com/MFBW1V2012-801-R-Cooper-Bussmann-datasheet-147669139.pdf?src-supplier=Sager+Electronics, ComponentLink1URL=http://datasheet.octopart.com/MFBW1V2012-801-R-Cooper-Bussmann-datasheet-147669139.pdf?src-supplier=Sager+Electronics, Manufacturer Part Number=MFBW1V2012-801-R, Pricing 1="1=0.10000, 10=0.04800, 25=0.04280, 50=0.03820, 100=0.03250, 250=0.02868, 500=0.02628, 1000=0.02245 (USD)", Stock 1=1000, Supplier 1=Digi-Key
R1: library part RMCF0805FT22R0, "RES 22 OHM 1/8W 1% 0805 SMD", Case Code (Imperial)=0805, Case Code (Metric)=2012, Manufacturer="Stackpole Electronics", Max Operating Temperature=155°C, Max Power Dissipation=125mW, Min Operating Temperature=-55°C, Resistance=22R, Resistor Type="Thick Film", Supplier Part Number 1=RMCF0805FT22R0CT-ND, Temperature Coefficient=100ppm/°C, Tolerance=1%, Case/Package=0805, Category="Chip SMD Resistors", ComponentLink1Description=http://components.arrow.com/part/dataview/53343875S4424N1174?src-supplier=Arrow+Electronics, ComponentLink1URL=http://components.arrow.com/part/dataview/53343875S4424N1174?src-supplier=Arrow+Electronics, ComponentLink2Description=https://www.seielect.com/catalog/SEI-Packaging.pdf?src-supplier=Digi-Key, ComponentLink2URL=https://www.seielect.com/catalog/SEI-Packaging.pdf?src-supplier=Digi-Key, ComponentLink3Description=http://www.seielect.com/Catalog/SEI-RMC.pdf?src-supplier=Future+Electronics, ComponentLink3URL=http://www.seielect.com/Catalog/SEI-RMC.pdf?src-supplier=Future+Electronics, ComponentLink4Description=https://www.seielect.com/catalog/SEI-RMCF_RMCP.pdf?src-supplier=Avnet, ComponentLink4URL=https://www.seielect.com/catalog/SEI-RMCF_RMCP.pdf?src-supplier=Avnet, Contact Plating=Tin,Matte, Features="Automotive AEC-Q200", Height=0.026inch, Lead Free="Lead Free", Length=0.079inch, Manufacturer Part Number=RMCF0805FT22R0, Mount="Surface Mount", Number of Terminations=2, Packaging="Tape and Reel", Power Rating=125mW, Pricing 1="1=0.10000, 10=0.02700, 100=0.01090, 1000=0.00488, 2500=0.00423 (USD)", Radiation Hardening=No, RoHS=Yes, RoHS Compliant=Yes, Series=RMCF, Size Code=0805, Stock 1=126411, Supplier 1=Digi-Key, Width=0.049inch
R2: library part RK73H2ATTD1803F, "Thick Film Resistors 1/4W 180K OHM 1%", Case Code (Imperial)=0805, Case Code (Metric)=2012, Manufacturer="KOA Speer", Max Operating Temperature=155°C, Min Operating Temperature=-55°C, Power Rating=125mW, Resistance=180kR, Resistance Tolerance=1%, Resistor Type="Thick Film", Supplier Part Number 1=2019-RK73H2ATTD1803FCT-ND, Temperature Coefficient=100ppm/°C, Voltage Rating=150V, Case/Package=0805, Category="Chip SMD Resistors", ComponentLink1Description=https://datasheet.ciiva.com/5557/rk73h-5557292.pdf?src-supplier=Mouser, ComponentLink1URL=https://datasheet.ciiva.com/5557/rk73h-5557292.pdf?src-supplier=Mouser, ComponentLink2Description=https://datasheet.ciiva.com/7763/549017-7763166.pdf?src-supplier=Element14, ComponentLink2URL=https://datasheet.ciiva.com/7763/549017-7763166.pdf?src-supplier=Element14, Construction=Rectangular, Depth=1.25mm, Lead Free="Lead Free", Length=2mm, Manufacturer Part Number=RK73H2ATTD1803F, Military Standard=Not, Number of Pins=2, Packaging="Tape and Reel", Pricing 1="1=0.10000, 10=0.03500, 100=0.01420, 1000=0.00640, 2500=0.00556 (USD)", RoHS=Yes, RoHS Compliant=Yes, Series=RK73H, Stock 1=4592, Supplier 1=Digi-Key, Termination=SMD/SMT, Tolerance=1%
R3: library part RMCF0805FT10K0, "RES 10K OHM 1% 1/8W 0805", Case Code (Imperial)=0805, Case Code (Metric)=2012, Manufacturer="Stackpole Electronics", Max Operating Temperature=155°C, Max Power Dissipation=125mW, Min Operating Temperature=-55°C, Resistance=10kR, Resistor Type="Thick Film", Supplier Part Number 1=RMCF0805FT10K0CT-ND, Temperature Coefficient=100ppm/°C, Tolerance=1%, Case/Package=0805, Category="Chip SMD Resistors", ComponentLink1Description=https://datasheet.ciiva.com/15193/getdatasheetpartid-362046-15193525.pdf?src-supplier=Verical, ComponentLink1URL=https://datasheet.ciiva.com/15193/getdatasheetpartid-362046-15193525.pdf?src-supplier=Verical, Construction=Rectangular, Contact Plating=Tin,Matte, Depth=1.25mm, Features="Automotive AEC-Q200", Height=0.026inch, Lead Free="Lead Free", Length=2mm, Manufacturer Part Number=RMCF0805FT10K0, Military Standard=Not, Mount="Surface Mount", Number of Terminations=2, Packaging="Tape and Reel", Power Rating=125mW, Pricing 1="1=0.10000, 10=0.02700, 100=0.01090, 1000=0.00488, 2500=0.00423 (USD)", Radiation Hardening=No, RoHS=Yes, RoHS Compliant=Yes, Series=RMCF, Size Code=0805, Stock 1=1832609, Supplier 1=Digi-Key, Width=0.049inch
R4: library part RMCF0805FT90K9, "Res Thick Film 0805 90.9K Ohm 1% 0.125W ±100ppm/°C Molded SMD Paper T/R", Case Code (Imperial)=0805, Case Code (Metric)=2012, Manufacturer="Stackpole Electronics", Max Operating Temperature=155°C, Max Power Dissipation=125mW, Min Operating Temperature=-55°C, Resistance=90.9kR, Resistor Type="Thick Film", Supplier Part Number 1=RMCF0805FT90K9CT-ND, Temperature Coefficient=100ppm/°C, Tolerance=1%, Case/Package=0805, Category="Chip SMD Resistors", ComponentLink1Description=https://datasheet.ciiva.com/3882/40960751s7172021n1174-3882844.pdf?src-supplier=Arrow+Electronics, ComponentLink1URL=https://datasheet.ciiva.com/3882/40960751s7172021n1174-3882844.pdf?src-supplier=Arrow+Electronics, ComponentLink2Description=https://datasheet.ciiva.com/15193/getdatasheetpartid-464223-15193623.pdf?src-supplier=Verical, ComponentLink2URL=https://datasheet.ciiva.com/15193/getdatasheetpartid-464223-15193623.pdf?src-supplier=Verical, Construction=Rectangular, Contact Plating=Tin,Matte, Depth=1.25mm, Features="Automotive AEC-Q200", Height=0.026inch, Lead Free="Lead Free", Length=0.079inch, Manufacturer Part Number=RMCF0805FT90K9, Military Standard=Not, Mount="Surface Mount", Number of Terminations=2, Packaging="Tape and Reel", Power Rating=125mW, Pricing 1="1=0.10000, 10=0.02700, 100=0.01090, 1000=0.00488, 2500=0.00423 (USD)", Radiation Hardening=No, RoHS=Yes, RoHS Compliant=Yes, Series=RMCF, Size Code=0805, Stock 1=27691, Supplier 1=Digi-Key, Width=0.049inch
T1: library part Transformer_749196141, "Flex Transformer WE-FLEX ER11/5", DC Resistance (DCR)=344mR, Inductance=8.5uH, Isolation Voltage=500V, Manufacturer="Wurth Electronics", Max Frequency=1MHz, Max Operating Temperature=125°C, Min Operating Temperature=-40°C, Secondary Current=550mA, Category=Uncategorized, ComponentLink1Description=https://datasheet.ciiva.com/16989/0900766b80649932-16989928.pdf?src-supplier=Allied+Electronics, ComponentLink1URL=https://datasheet.ciiva.com/16989/0900766b80649932-16989928.pdf?src-supplier=Allied+Electronics, Depth=6.2mm, Length=12.9mm, Manufacturer Part Number=749196141, Mount="Surface Mount", Packaging="Cut Tape", Pricing 1="1=5.06000, 10=4.59200, 50=4.15500, 100=3.69600 (USD)", RoHS=Yes, RoHS Compliant=Yes, Series=WE-FLEX, Stock 1=1871, Supplier 1=Digi-Key, Turns Ratio=1:1, Width=9.2mm
U1: "IC REG MULT CONFIG INV ADJ 8MSOP", Case/Package=MSOP, Manufacturer="Analog Devices / Linear Technology", Manufacturer Part Number=LT3580EMS8E#PBF, Max Input Voltage=32V, Max Operating Temperature=125°C, Max Output Current=2.8A, Max Output Voltage=42V, Min Input Voltage=2.5V, Min Operating Temperature=-40°C, Min Output Voltage=-400mV, Output Current=2A, Output Voltage=12V, Package Quantity=50, Supplier Part Number 1=LT3580EMS8E#PBF-ND, Switching Frequency=2.5MHz, Category="Voltage Regulators - Switching", ComponentLink1Description=https://datasheet.ciiva.com/7363/85270-7363576.pdf?src-supplier=Newark, ComponentLink1URL=https://datasheet.ciiva.com/7363/85270-7363576.pdf?src-supplier=Newark, ComponentLink2Description=https://datasheet.ciiva.com/6192/1599224-6192934.pdf?src-supplier=Farnell, ComponentLink2URL=https://datasheet.ciiva.com/6192/1599224-6192934.pdf?src-supplier=Farnell, ComponentLink3Description=https://datasheet.ciiva.com/7905/1599224-7905879.pdf?src-supplier=Element14, ComponentLink3URL=https://datasheet.ciiva.com/7905/1599224-7905879.pdf?src-supplier=Element14, ComponentLink4Description=https://datasheet.ciiva.com/2024/29562-2024728.pdf?src-supplier=Digi-Key, ComponentLink4URL=https://datasheet.ciiva.com/2024/29562-2024728.pdf?src-supplier=Digi-Key, Efficiency=88%, Height=0.86mm, Length=3mm, Number of Outputs=1, Number of Pins=8, Output Type=Fixed,Adjustable, Packaging=Rail/Tube, Pricing 1="1=5.62000, 10=5.04600, 25=4.77000, 100=4.13400, 250=3.92200, 500=3.51920, 1000=3.00000 (USD)", REACH SVHC="No SVHC", RoHS=Yes, Stock 1=2999, Supplier 1=Digi-Key, Synchronous Rectifier=No, Topology=Boost, Width=3mm
U2: "IC REG LINEAR +-5V 14DFN", Case/Package=DFN, Current - Output 1=150mA, Dropout Voltage=300mV, Manufacturer="Analog Devices / Linear Technology", Max Input Voltage=20V, Max Operating Temperature=125°C, Max Output Voltage=5V, Min Current Limit=170mA, Min Input Voltage=2.3V, Min Operating Temperature=-40°C, Operating Supply Current=25uA, Package Quantity=91, Power Supply Rejection Ratio (PSRR)=68dB, Supplier Part Number 1=LT3032EDE-5#PBF-ND, Voltage - Output 2=-5V, Category="Voltage Regulators - Linear", ComponentLink1Description=https://datasheet.ciiva.com/8041/1679619-8041889.pdf?src-supplier=Element14, ComponentLink1URL=https://datasheet.ciiva.com/8041/1679619-8041889.pdf?src-supplier=Element14, ComponentLink2Description=https://datasheet.ciiva.com/2041/29070-2041604.pdf?src-supplier=Digi-Key, ComponentLink2URL=https://datasheet.ciiva.com/2041/29070-2041604.pdf?src-supplier=Digi-Key, Current - Output 2=150mA, Manufacturer Part Number=LT3032EDE-5#PBF, Min Output Voltage=5V, Number of Outputs=2, Number of Pins=14, Number of Regulators=2, Output Current=150mA, Output Voltage=5V, Packaging=Rail/Tube, Polarity=Positive,Negative, Pricing 1="1=5.87000, 10=5.27300, 25=4.98480, 100=4.32000, 250=4.09848, 500=3.67756, 1000=3.13500 (USD)", REACH SVHC="No SVHC", RoHS=Yes, RoHS Compliant=Yes, Series=-, Stock 1=4272, Supplier 1=Digi-Key, Voltage - Output 1=5V
U3: "IC REG LINEAR +-15V 14DFN", Case/Package=DFN, Dropout Voltage=300mV, Manufacturer="Analog Devices / Linear Technology", Max Input Voltage=20V, Max Operating Temperature=125°C, Max Output Voltage=15V, Min Current Limit=170mA, Min Input Voltage=2.3V, Min Operating Temperature=-40°C, Operating Supply Current=25uA, Output Current=150mA, Package Quantity=91, Power Supply Rejection Ratio (PSRR)=68dB, Supplier Part Number 1=161-LT3032IDE-15#PBF-ND, Category="Voltage Regulators - Linear", ComponentLink1Description=https://datasheet.ciiva.com/2059/29070-2059004.pdf?src-supplier=Digi-Key, ComponentLink1URL=https://datasheet.ciiva.com/2059/29070-2059004.pdf?src-supplier=Digi-Key, Lead Free="Lead Free", Manufacturer Part Number=LT3032IDE-15#PBF, Min Output Voltage=15V, Number of Outputs=2, Number of Pins=14, Number of Regulators=2, Output Voltage=15V, Packaging=Rail/Tube, Pricing 1="1=6.80000, 10=6.10500, 25=5.77160, 100=5.00210, 250=4.74560, 500=4.25824, 1000=3.63000 (USD)", RoHS=Yes, RoHS Compliant=Yes, Stock 1=249, Supplier 1=Digi-Key

## Via types
v1: diameter 0.6, hole 0.4, Top Layer to Bottom Layer, tented both sides, 45 vias
v2: diameter 0.6, hole 0.3, Top Layer to Bottom Layer, tented both sides, 27 vias
v3: diameter 0.5, hole 0.4, Top Layer to Bottom Layer, tented both sides, 14 vias
v4: diameter 0.5, hole 0.3, Top Layer to Bottom Layer, tented both sides, 6 vias

## Nets (pads, with @x,y where several pads share a name; then routed paths per layer and width w, separated by ;. In a path a pad name is that pad's centre, name@x,y a point inside that pad or via, vN(x,y) a via of type N, cw(c..) or ccw(c..) an arc to the next point about the centre after c; other vN are vias at no path point)
0V: C1.2 C3.2 C4.2 C5.2 C6.2 C8.2 C10.2 C11.2 C13.2 C14.2 C15.2 C16.1 C17.2 C20.2 C21.2 C22.2 C24.2 C25.2 C26.2 H1.1 H1.2 H1.3 H1.4 J1.4 J1.Shell J2.9 J3.9 R4.2 T1.8 T1.12 U1.8 U1.9 U2.4 U2.5 U2.15 U3.4 U3.5 U3.15 | length 34.3
  Top Layer w0.203: U3.4 U3.5 ; U2.4 U2.5
  Top Layer w0.254: v4(32.985,11.565) 33.36,11.19 U1.8
  Top Layer w0.381: C15.2 4.064,33.801 v1(4.064,32.893) ; C11.2 4.08,44.701 v1(4.08,45.69) ; v2(5.43,14.197) 6.586,15.353 6.586,15.451 ; v1(7.889,45.155) 8.381,44.663 C20.2 ; C24.2 9.122,32.788 v1(9.144,32.766) ; C3.2 12.913,33.823 v1(12.954,33.782) ; C1.2 11.697,44.698 v1(11.697,45.569) ; U2.15 U2.15@13.702,39.243 ; v1(15.39,44.818) 16.587,44.818 C6.2 ; v1(15.494,33.782) 15.535,33.823 C8.2 ; v1(21.082,46.355) 21.087,46.36 C10.2 ; v1(25.4,46.355) 25.405,46.36 C13.2 ; v1(28.067,9.271) 28.128,9.21 R4.2 ; C14.2 28.575,41.214 v1(28.575,40.132) ; T1.12 30.306,33.829 v1(30.353,33.782) ; v1(30.607,6.858) 31.328,6.858 C22.2 ; v1(30.988,40.132) 30.988,41.263 C16.1 ; C17.2 32.959,46.355 v1(34.036,46.355) ; v1(33.274,16.073) 33.315,16.114 C26.2 33.315,18.247 v1(33.274,18.288) ; C25.2 35.265,5.883 v1(35.306,5.842) ; C21.2 37.404,46.355 v1(38.481,46.355) ; T1.8 38.354,35.391 v1(38.354,33.851) ; v1(43.475,7.071) C4.2 43.475,9.357 v1@43.516,9.398 ; v1(45.466,14.732) 45.425,14.773 C5.2 45.425,16.977 v1(45.466,17.018)
  other v1: 43.495,9.378 13.007,16.216 11.296,16.472 15.196,16.647 9.778,17.196 16.687,17.54 8.54,18.317 17.808,18.778 7.647,19.808 18.532,20.296 7.216,21.997 18.784,22 7.556,23.704 18.319,24.273 8.279,25.221 17.403,25.751 9.401,26.46 16.144,26.855 10.892,27.352 14.627,27.551 13.08,27.784
  other v3: 5.312,38.735 6.282,38.743 12.932,38.735 13.902,38.743 5.312,39.751 6.282,39.743 12.932,39.751 13.902,39.743
  other v4: 31.785,11.565 32.385,11.565 31.785,12.565 32.385,12.565 32.985,12.565
+5V: C2.2 C3.1 J2.7 J3.7 U2.1 | length 99.3
  Top Layer w0.24: U2.1 12.139,37.793 11.662,37.316 C3.1 12.106,35.773 13.081,34.798 13.589,34.798 14.202,34.185 C2.2
  Top Layer w0.381: C3.1 10.717,35.773 10.414,35.47 10.414,33.125 10.738,32.801 18.908,32.801 v2(19.963,31.746) ; v2(24.367,27.392) 24.369,27.392 24.369,27.311 24.411,27.269 24.411,7.708 29.097,3.023 48.184,3.023 48.945,3.784 48.945,4.408 48.945,10.669 53.093,14.817 56.644,14.817 57.323,15.495 57.323,18.519 J3.7
  Bottom Layer w0.381: J2.7 17.457,29.24 v2(19.963,31.746) 20.451,31.746 24.367,27.83 v2(24.367,27.392)
+8V: C1.1 C13.1 L3.2 U2.12 U2.14 | length 33.5
  Top Layer w0.24: C1.1 11.281,42.332 11.281,41.529 12.117,40.693 U2.14 ; C1.1@11.789,42.545 11.789,41.783 12.043,41.529 13.567,41.529 13.702,41.394 U2.12
  Top Layer w0.381: L3.2@27.559,44.704 27.559,46.101 C13.1@28.251,46.793
  Top Layer w0.635: C1.1 12.741,42.713 12.954,42.926 12.954,46.304 17.924,46.304 17.975,46.355 18.288,46.355 21.59,49.657 27.559,49.657 28.509,48.707 28.509,47.026 28.509,46.793 C13.1
+15V: C12.2 C15.1 J2.6 J3.6 U3.1 | length 130.6
  Top Layer w0.24: U3.1 4.497,37.793 4.042,37.338 C15.1 4.845,35.773 5.439,35.179 5.439,34.163 5.779,33.823 C12.2
  Top Layer w0.381: C15.1 3.007,35.773 2.54,35.306 2.54,32.512 v2(4.318,30.734) 1.616,28.032 1.616,16.032 5.255,12.393 8.257,9.391 21.467,9.391 22.811,8.048 22.811,7.046 28.434,1.422 48.847,1.422 50.545,3.121 50.545,3.746 50.545,10.006 51.568,11.028 51.592,11.028 52.979,12.415 v2(53.593,12.415) ; v2(5.715,30.734) 6.985,32.004 8.812,32.004 9.604,32.004 9.858,32.258 18.161,32.258 v2(21.209,29.21)
  Bottom Layer w0.381: v2(4.318,30.734) v2(5.715,30.734) ; J2.6 19.317,27.318 v2(21.209,29.21) ; v2(53.593,12.415) 53.667,12.489 53.697,12.489 53.697,21.543 J3.6
+16V: C10.1 C11.1 L2.2 R2.1 U3.12 U3.14 | length 93.4
  Top Layer w0.254: C11.1 4.042,41.148 4.497,40.693 U3.14 ; C11.1@4.233,42.522 4.405,42.35 4.405,42.055 4.677,41.783 5.947,41.783 6.082,41.648 U3.12 ; C10.1 24.765,45.659 24.765,44.704 24.13,44.069 21.209,44.069 20.066,42.926 20.066,37.592 26.035,31.623 26.035,9.784 27.564,8.255 28.58,7.239 28.58,5.964 29.337,5.207 35.673,5.207 36.195,5.729 36.195,7.747 35.56,8.382 R2.1
  Top Layer w0.381: L2.2 23.815,44.77 24.064,45.019 C10.1
  Top Layer w0.635: C11.1 5.121,42.713 5.334,42.926 5.334,45.593 5.715,45.974 9.525,45.974 11.43,47.879 17.272,47.879 v2(17.272,47.912) ; v2(22.352,47.879) 23.622,47.879 24.039,47.462 C10.1@24.039,46.335
  Bottom Layer w0.635: v2(17.272,47.912) 17.272,47.879 v2(22.352,47.879)
-5V: C7.1 C8.1 J2.3 J3.3 U2.7 | length 125.5
  Top Layer w0.24: C7.1 14.721,44.663 15.494,43.89 v2(15.494,42.545) ; U2.7 15.702,36.092 16.021,35.773 C8.1 16.51,36.005 v2(16.51,40.64)
  Top Layer w0.381: v2(8.189,11.496) 8.227,11.458 17.455,11.458 23.642,17.645 23.642,29.508 18.407,34.743 17.2,34.743 16.742,35.2 C8.1 16.939,35.97 16.939,40.144 17.228,40.433 v2(17.228,41.127) ; v2(16.139,49.005) 16.139,51.94 17.029,52.83 43.745,52.83 51.033,45.542 51.033,39.659 55.513,35.179 J3.3
  Bottom Layer w0.24: v2(15.494,42.545) 15.494,41.656 v2(16.51,40.64)
  Bottom Layer w0.381: v2(8.189,11.496) 8.189,12.284 6.858,13.615 J2.3 ; v2(16.139,49.005) 16.139,42.215 v2(17.228,41.127)
-8V: C6.1 C17.1 L4.2 U2.6 U2.9 U2.10 U2.16 | length 30.8
  Top Layer w0.24: U2.10 14.702,41.831 16.536,41.831 16.742,42.037 C6.1 ; U2.6 15.202,39.198 U2.16 ; U2.9@15.202,40.743 15.202,41.402 16.615,41.402 17.25,42.037 C6.1@17.25,42.418
  Top Layer w0.381: C17.1 31.009,46.355 32.004,46.355 32.004,44.794 L4.2
  Top Layer w0.635: C6.1 17.25,42.713 17.694,42.713 18.034,43.053 18.034,44.704 22.098,48.768 26.67,48.768 v2(27.559,47.879) ; v2(29.464,47.879) 30.734,47.879 31.004,47.609 C17.1
  Bottom Layer w0.635: v2(27.559,47.879) v2(29.464,47.879)
  other v3: 15.002,38.743 15.502,39.243 15.002,39.743
-15V: C23.1 C24.1 J2.2 J3.2 U3.7 | length 112.2
  Top Layer w0.24: C23.1 7.512,44.663 8.001,44.174 8.001,42.418 v2(7.97,42.418) ; U3.7 8.54,37.793 8.708,37.625 8.708,36.187 C24.1 9.122,35.79 9.122,40.662 v2(9.08,40.703)
  Top Layer w0.381: v2(4.318,14.986) 3.81,14.986 2.413,16.383 2.413,27.686 4.961,30.234 4.961,31.123 6.793,32.955 7.424,32.955 7.625,33.156 7.625,34.168 7.874,34.417 7.874,35.433 8.214,35.773 C24.1 ; C24.1@9.122,35.782 9.972,35.782 10.424,36.234 v2(10.424,40.828) ; v2(9.972,47.526) 10.991,48.544 14.054,48.544 15.558,50.049 15.558,52.114 16.808,53.364 17.114,53.364 44.078,53.364 51.572,45.869 51.572,43.32 J3.2
  Bottom Layer w0.24: v2(7.97,42.418) 8.001,42.418 8.001,41.656 9.017,40.64 v2(9.08,40.703)
  Bottom Layer w0.381: v2(4.318,14.986) 6.111,16.779 J2.2 ; v2(9.972,47.526) 9.972,40.926 9.978,40.921 10.056,40.842 10.071,40.828 v2(10.424,40.828)
-16V: C20.1 C21.1 L5.2 U3.6 U3.9 U3.10 U3.16 | length 45.3
  Top Layer w0.24: U3.10 7.082,41.783 8.614,41.783 8.868,42.037 8.868,42.291 9.122,42.545 C20.1 9.206,42.629 9.376,42.459 9.376,41.91 8.868,41.402 7.582,41.402 U3.9@7.582,40.743 ; U3.6 7.582,39.198 U3.16
  Top Layer w0.381: C21.1 36.063,46.36 36.449,45.974 L5.2@36.449,44.704
  Top Layer w0.635: C20.1 9.376,42.713 10.201,42.713 10.414,42.926 10.414,45.593 11.557,46.736 12.221,46.736 12.577,47.092 17.598,47.092 17.649,47.142 17.805,47.142 21.209,50.546 33.274,50.546 35.449,48.371 C21.1
  other v3: 7.382,38.743 7.882,39.243 7.382,39.743
NetC2_1: C2.1 U2.3 | length 2.2
  Top Layer w0.24: U2.3 13.702,37.076 14.202,36.576 C2.1
NetC4_1: C4.1 J1.1 L1.1 | length 10.4
  Top Layer w0.381: J1.1 44.45,9.928 44.45,8.636 44.831,8.255 C4.1 45.425,9.439 45.085,9.779 L1.1
NetC7_2: C7.2 U2.11 | length 2
  Top Layer w0.24: U2.11 C7.2
NetC9_1: C9.1 D1.K L2.1 | length 4.9
  Top Layer w0.381: D1.K 21.689,39.723 22.114,40.148 C9.1 22.611,41.28 23.114,41.783 L2.1@23.114,42.799
NetC9_2: C9.2 C14.1 D2.K L3.1 | length 7.7
  Top Layer w0.381: C9.2 25.312,41.28 ; D2.K 26.134,39.398 25.312,40.22 25.312,41.28 ; L3.1@27.559,42.799 27.559,41.656 27.183,41.28 C14.1 25.312,41.28
NetC12_1: C12.1 U3.3 | length 2.2
  Top Layer w0.24: U3.3 6.082,37.076 6.582,36.576 C12.1
NetC16_2: C16.2 C19.1 D3.A L4.1 | length 7.8
  Top Layer w0.381: L4.1 31.979,41.554 32.253,41.28 C16.2 34.202,41.28 ; D3.A 33.379,39.221 34.202,40.044 34.202,41.28 ; C19.1 34.202,41.28
NetC18_2: C18.2 R1.1 | length 2.3
  Top Layer w0.254: R1.1 29.21,15.748 29.505,16.043 C18.2
NetC19_2: C19.2 D4.A L5.1 | length 5.1
  Top Layer w0.381: L5.1 36.424,41.554 36.698,41.28 C19.2 37.399,40.325 37.824,39.9 D4.A
NetC23_2: C23.2 U3.11 | length 2
  Top Layer w0.254: U3.11 C23.2
NetC25_1: C25.1 U1.7 | length 3.1
  Top Layer w0.254: U1.7 32.71,8.946 33.315,8.341 C25.1
NetC26_1: C26.1 R3.2 | length 2.3
  Top Layer w0.254: C26.1 35.265,16.297 35.56,16.002 R3.2
NetD1_A: D1.A T1.1 | length 17.7
  Top Layer w0.381: 24.489,37.951 D1.A
  Top Layer w0.635: 24.489,37.951 24.489,37.106 30.306,31.289 30.306,29.106 T1.1
NetD2_A: D2.A T1.4 T1.11 | length 19.6
  Top Layer w0.381: D2.A 28.934,37.995 29.591,37.338 31.75,37.338 32.306,36.782 T1.11
  Top Layer w0.635: T1.11 32.306,30.198 36.306,26.198 T1.4
NetD3_K: D3.K T1.9 T1.10 | length 8.2
  Top Layer w0.381: D3.K 30.607,38.767 30.607,38.227 30.861,37.973 33.147,37.973 34.306,36.814 T1.10
  Top Layer w0.635: T1.10 T1.9
NetD4_K: D4.K T1.7 | length 8.1
  Top Layer w0.381: D4.K 35.024,38.001 35.433,37.592 39.878,37.592 40.306,37.164 T1.7
NetJ2_1: J2.1 J3.1 | length 107.6
  Top Layer w0.381: v2(1.451,15.241) 7.854,8.839 21.265,8.839 22.278,7.827 22.278,6.825 28.239,0.863 49.042,0.863 51.079,2.9 51.079,9.577 v2(51.311,9.809) ; v2(49.769,13.256) 54.59,18.078 54.59,32.235 55.495,33.14 56.478,33.14 57.186,33.848 57.186,41.516 J3.1
  Bottom Layer w0.381: v2(1.451,15.241) 1.448,15.238 1.299,15.238 4.954,18.893 J2.1 ; v2(49.769,13.256) 49.792,13.256 51.311,11.738 v2(51.311,9.809)
NetJ2_4: J2.4 J3.4 | length 82.9
  Top Layer w0.381: v2(10.326,10.62) 10.326,10.221 10.608,9.94 21.673,9.94 23.344,8.269 23.344,7.267 28.655,1.956 48.626,1.956 50.012,3.342 50.012,3.967 50.012,10.227 50.828,11.043 53.479,13.694 57.03,13.694 58.39,15.054 58.39,27.548 55.903,30.035 J3.4
  Bottom Layer w0.381: v2(10.326,10.62) 10.326,13.89 10.318,13.898 J2.4
NetJ2_5: J2.5 J3.5 | length 74.6
  Top Layer w0.381: v2(12.871,10.815) 13.085,10.601 21.767,10.601 23.878,8.489 23.878,7.487 28.876,2.489 48.405,2.489 49.479,3.563 49.479,4.187 49.479,10.448 53.314,14.283 56.865,14.283 57.856,15.275 57.856,25.704 55.903,27.657 J3.5
  Bottom Layer w0.381: v2(12.871,10.815) 12.871,13.468 12.877,13.474 13.111,13.708
NetJ2_8: J2.8 J3.8 | length 76.2
  Top Layer w0.381: v2(24.638,29.591) 25.019,29.21 25.019,7.855 29.318,3.556 47.963,3.556 48.412,4.005 48.412,10.89 53.651,16.129 J3.8
  Bottom Layer w0.381: J2.8 15.306,30.821 17.251,32.766 21.463,32.766 v2(24.638,29.591)
NetR1_2: R1.2 T1.2 T1.3 U1.4 | length 19.2
  Top Layer w0.254: R1.2@29.276,12.954 30.226,12.954 30.48,13.208 30.48,13.97 30.775,14.265 U1.4
  Top Layer w0.635: R1.2@29.276,12.954 27.94,12.954 27.432,13.462 27.432,17.272 32.306,22.146 T1.2 T1.3
NetR2_2: R2.2 U1.1 | length 4.7
  Top Layer w0.254: U1.1 33.36,13.503 34.163,12.7 34.163,11.557 34.61,11.11 R2.2 R2.2@35.626,11.176
NetR3_1: R3.1 U1.2 | length 5.9
  Top Layer w0.254: U1.2 32.71,15.336 32.868,15.494 33.726,15.494 33.909,15.311 33.909,14.351 34.29,13.97 35.179,13.97 35.56,13.589 R3.1
NetR4_1: R4.1 U1.6 | length 3.8
  Top Layer w0.254: R4.1 29.243,11.077 30.513,11.077 30.668,10.922 31.75,10.922 32.06,10.612 U1.6
Vin: C5.1 C18.1 C22.1 L1.2 T1.5 T1.6 U1.3 U1.5 | length 59.9
  Top Layer w0.254: C22.1 29.505,7.915 29.718,8.128 30.734,8.128 31.41,8.804 U1.5 ; 31.496,18.245 31.496,17.145 31.496,16.002 32.06,15.438 U1.3
  Top Layer w0.381: C5.1 43.475,14.691 43.942,14.224 44.704,14.224 45.085,13.843 L1.2
  Top Layer w0.508: C22.1 29.505,6.309 29.972,5.842 34.036,5.842 34.29,6.096 34.29,7.874 34.29,9.906 34.544,10.16 36.703,10.16 37.465,9.398 38.735,9.398 39.37,10.033 39.37,14.859 40.386,15.875 41.021,15.875 C5.1 43.475,18.501 41.275,20.701 40.386,20.701 ; 31.496,18.245 31.496,19.304 32.893,20.701 38.354,20.701 ; T1.5 38.354,23.441 38.354,20.701 ; T1.6 40.386,23.409 40.386,20.701 ; 38.354,20.701 40.386,20.701
pads on no net: J1.2 J1.3 U2.2 U2.8 U2.13 U3.2 U3.8 U3.13

## Polygon pours and split planes (outlines as drawn)
0V on Bottom Layer "0V_L02_P003" (solid, pour order 3): 0,4.999 ccw(c4.999,4.999) 4.999,0 55.001,0 ccw(c55.001,4.999) 60,5.003 60,4.999 60,50.001 ccw(c55.001,50.001) 55.001,55 4.999,55 ccw(c4.999,50.001) 0,50.001
-16V on Bottom Layer "-16V_L02_P002" (solid, pour order 2): 6.872,40.185 6.872,35.996 9.067,35.996 9.067,40.185
-8V on Bottom Layer "-8V_L02_P000" (solid, pour order 0): 14.492,40.185 14.492,35.996 16.687,35.996 16.687,40.185
no net on Bottom Overlay "0V_L02_P-001" (solid): 44.315,52.165 50.315,52.165 50.315,46.165 44.315,46.165
0V on Top Layer "0V_L01_P001" (solid, pour order 1): 13,11.84 cw(c13,22) 2.84,22 cw(c13,22) 13,32.16 cw(c13,22) 23.16,22 cw(c13,22)
no net on Top Overlay "0V_L02_P-001" (solid): 8.755,14.065 14.755,14.065 14.755,8.065 8.755,8.065

## Keep-outs
Keep-Out Layer: